# Altium PCB Booster_Common_Channel_RF.PcbDoc (part 3 of 3)
Units mm, origin at the board's own origin, x right, y up, seen from the top; angles counter-clockwise.
Board outline 159.2 x 28.7 mm, 2 copper layers (Top Layer, Bottom Layer), stack 1.071 mm thick; 192 components, 112 nets, 503 pads, 510 vias.
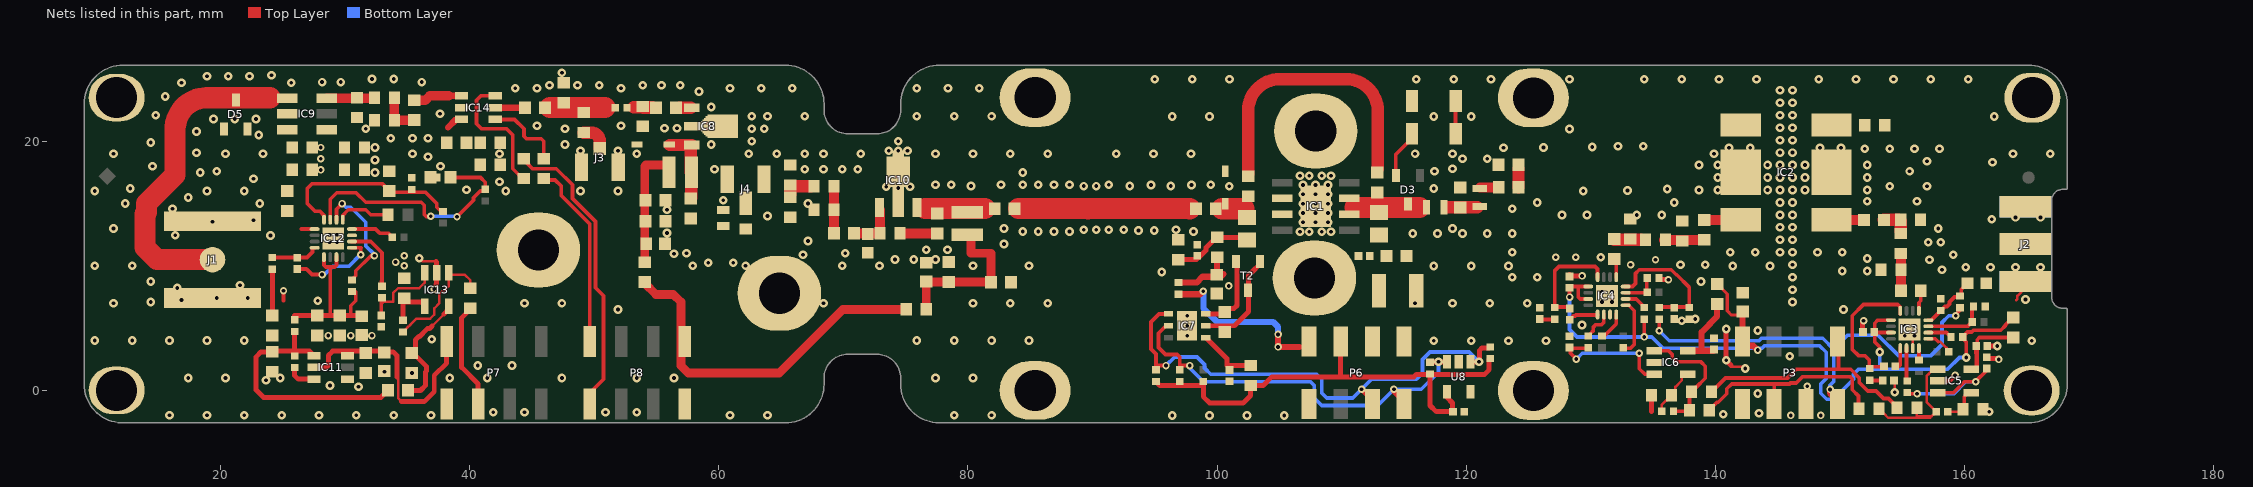
[diagram p2: the nets of this part, all layers, seen from the top]

## Via types
v1: diameter 0.7, hole 0.3, Top Layer to Bottom Layer, tented both sides, 450 vias
v2: diameter 0.6, hole 0.3, Top Layer to Bottom Layer, tented both sides, 60 vias

## Nets (pads, with @x,y where several pads share a name; then routed paths per layer and width w, separated by ;. In a path a pad name is that pad's centre, name@x,y a point inside that pad or via, vN(x,y) a via of type N, cw(c..) or ccw(c..) an arc to the next point about the centre after c; other vN are vias at no path point) (continued)
FWD_VREF: P3.1 R20.1 R24.1 | length 34
  Top Layer w0.3: v2(135.5,4.77) R24.1@135.5,5.67 ; v2(159.3,5.97) 159.3,6.07 R20.1@159.6,6.37
  Top Layer w0.5: v2(149.21,0.06) 149.21,-0.24 P3.1@149.8,-0.83
  Bottom Layer w0.3: v2(135.5,4.77) 136.3,3.97 143.5,3.97 143.7,4.17 148.624,4.17 149.5,3.294 ; v2(149.21,0.06) 149.21,0.39 149.5,0.68 149.5,3.294 ; v2(159.3,5.97) 158.747,5.97 158.2,5.423 158.2,3.658 157.312,2.77 154.7,2.77 153.058,4.412 150.617,4.412 149.5,3.294
FWD_VRMS: P3.5 R17.2 R42.1 | length 17.4
  Top Layer w0.3: R17.2@139.522,-1.632 139.597,-1.557 R17.2@139.572,-1.532 ; R17.2@139.522,-1.582 140.127,-0.977 140.24,-0.977 140.92,-0.298 140.92,0.105 141.315,0.5 144.638,0.5 ; P3.5@144.73,-1.15 144.73,0.408 144.638,0.5 ; R42.1@151.5,-1.53 151.5,-0.465 151,0.035 151,0.899 150.824,1.074 147.004,1.074 146.5,0.57 146.04,0.57 145.97,0.5 144.638,0.5
GND: C2.1 C3.1 C4.1 C5.1 C6.1 C7.1 C8.1 C13.1 C14.1 C17.1 C18.1 C20.2 C21.1 C23.2 C24.1 C25.1 C26.1 C27.1 C29.1 C30.1 C31.1 C32.1 C33.1 C35.1 C36.1 C37.1 C43.1 C45.1 C46.1 C47.1 C51.2 C52.1 C53.1 C54.1 C55.1 C56.2 C57.1 C58.1 C59.1 C60.2 D1.1 D4.2 D5.1 D5.2 D6.1 IC1.9 IC2.2 IC2.3 IC2.6 IC2.7 IC3.11 IC3.17 IC4.11 IC4.17 IC5.2 IC6.2 IC7.2 IC7.7 IC8.2 IC9.2 IC10.2 IC10.4 IC11.1 IC12.11 IC12.17 IC13.2 IC14.2 J1.2 J2.2 J3.2 J4.2 L10.1 P3.3 P3.7 P6.7 P7.7 P8.1 pad.0 pad.1 pad.2 pad.3 pad.4 pad.5 pad.6 pad.7 R9.1 R13.1 R14.1 R15.1 R16.1 R21.1 R28.2 R31.1 R32.1 R40.2 R45.1 R46.1 R48.2 R49.2 R52.1 R53.1 R54.1 R56.2 R58.1 R59.1 R60.2 R61.2 R65.1 R68.1 R73.2 T2.1 T2.3 U8.2 U8.5 | length 27.8
  Top Layer w0.203: 36.189,10.332 37.298,10.332 37.3,10.33 ; 141.258,1.994 141.357,1.896 142.244,1.896 v1(142.4,1.74) ; v1(154.4,-0.162) C20.2@154.4,0.77 ; IC3.11@155.85,3.42 IC3.17@155.85,4.62 ; 164.15,7.22 164.245,7.315 164.245,7.573 J2.2@164.9,8.227
  Top Layer w0.3: 25.05,7.18 v2(25.05,7.98)
  Top Layer w0.4: 37.298,8.48 37.35,8.532 37.35,10.28 37.3,10.33 ; IC7.2@99.1,5.17 101.4,5.17 102.529,6.299 102.529,9.199 102.8,9.47 102.8,9.487 103.433,10.12 T2.1@103.433,10.32 ; C17.1@128.3,9.27 128.4,9.17 v2(129.3,9.17) ; 134.88,-1.725 R32.1@134.88,-0.275 ; R9.1@135.431,9 135.561,8.87 v2(136.24,8.87) ; v1@140.9,4.94 v1(140.875,4.915) v1(140.875,2.402) 140.875,2.378 141.258,1.994 ; C14.1@151.8,4.67 151.8,5.47 v2(151.9,5.57) ; IC3.17@155.6,4.87 IC3.17@155.85,4.62 ; IC5.2@158,0.74 158.794,0.74 159.25,1.196 v2(159.247,1.196) ; C26.1@161.789,2.64 161.899,2.53 162.645,2.53 162.71,2.465 v2(162.76,2.465) ; C21.1@161.891,3.54 162.631,3.54 v1(162.641,3.55)
  other v1: 96.4,-2.03 99.4,-2.03 102.4,-2.03 105.4,-2.03 15.9,-2.02 18.9,-2.02 21.9,-2.02 24.9,-2.02 27.9,-2.02 30.9,-2.02 33.9,-2.02 36.9,-2.02 60.9,-2.02 63.9,-2.02 78.9,-2.02 81.9,-2.02 140.645,-1.932 143.508,-1.855 41.9,-1.77 44.4,-1.77 50.9,-1.77 53.4,-1.77 162,-1.73 143.399,-0.272 31.067,0.28 28.79,0.38 23.65,0.797 17.4,0.98 20.4,0.98 24.79,0.98 38.4,0.98 41.4,0.98 47.4,0.98 53.4,0.98 56.4,0.98 77.4,0.98 80.4,0.98 35.357,1.37 33.15,1.48 40.65,1.98 43.4,1.98 145.978,2.727 117.4,3.97 120.4,3.97 123.4,3.97 126.4,3.97 165.4,3.97 9.9,3.98 12.9,3.98 15.9,3.98 18.9,3.98 21.9,3.98 75.9,3.98 78.9,3.98 81.9,3.98 84.9,3.98 36.95,4.08 97.6,4.37 155.2,4.37 156,4.37 143.407,4.781 97.6,5.17 155.2,5.17 156,5.17 129.3,5.232 137.3,5.57 138.4,5.72 97.6,5.97 51.9,6.48 150.3,6.47 11.4,6.98 44.4,6.98 47.4,6.98 68.4,6.98 80.4,6.98 83.4,6.98 86.4,6.98 115.9,6.97 118.9,6.97 121.9,6.97 124.9,6.97 14.4,7.08 130.9,7.07 131.7,7.07 146.2,7.07 27.79,7.18 16.855,7.23 164.9,7.274 19.685,7.4 22.174,7.4 130.9,7.87 131.7,7.87 146.2,8.07 16.526,8.206 21.55,8.426 138.85,8.72 14.4,8.73 123.7,9.07 125.7,9.07 146.2,9.07 95.56,9.487 150.2,9.57 152.2,9.57 158.2,9.67 160.1,9.87 162.1,9.87 164.1,9.87 166.1,9.87 9.9,9.98 12.9,9.98 57.9,9.98 62.15,9.98 69.9,9.98 72.9,9.98 80.4,9.98 84.9,9.98 117.4,9.97 120.4,9.97 123.4,9.97 141.4,9.97 144.4,9.97 137.2,10.07 139.2,10.07 146.2,10.07 59.15,10.23 61.15,10.23 157.2,10.47 74.15,10.48 75.65,10.48 77.4,10.48 152.2,10.57 35.941,10.58 130.8,10.67 159.1,10.87 66.75,10.88 56.4,10.96 57.4,10.98 70.15,10.98 123.7,11.07 141.2,11.07 143.2,11.07 145.2,11.07 146.2,11.07 148.2,11.07 150.2,11.07 76.65,11.28 78.35,11.28 82.9,11.73 157.1,11.87 158.1,11.87 67.15,11.98 145.2,12.07 146.2,12.07 23.998,12.42 16.35,12.43 115.7,12.57 117.7,12.57 119.7,12.57 121.7,12.57 123.7,12.57 55.845,12.62 84.4,12.73 85.65,12.73 86.9,12.73 88.15,12.73 98.1,12.73 106.65,12.72 107.4,12.72 108.4,12.72 109.15,12.72 93.7,12.82 94.948,12.82 89.3,12.87 90.3,12.87 91.3,12.87 92.5,12.87 96.7,12.87 11.4,12.98 82.9,12.98 118.9,12.97 157.9,12.97 145.2,13.07 146.2,13.07 106.9,13.47 107.9,13.47 108.9,13.47 19.35,13.51 22.65,13.63 162.199,13.717 164.1,13.87 166.1,13.87 63.9,13.98 127.7,14.07 129.7,14.07 133.7,14.07 135.7,14.07 145.2,14.07 146.2,14.07 106.9,14.22 107.9,14.22 108.9,14.22 55.845,14.486 16.131,14.561 123.7,14.57 12.35,14.98 23.15,14.98 67.15,14.98 106.9,14.97 107.9,14.97 108.9,14.97 125.7,15.07 136.7,15.07 145.2,15.07 146.2,15.07 152.2,15.17 156.2,15.17 60.35,15.249 17.4,15.471 106.9,15.72 107.9,15.72 108.9,15.72 9.9,15.98 18.9,15.98 21.9,15.98 42.9,15.98 48.9,15.98 51.9,15.98 129.392,15.984 132.958,16.035 39.75,16.08 138.7,16.07 140.2,16.07 144.2,16.07 145.2,16.07 146.2,16.07 147.2,16.07 152.2,16.07 136.14,16.142 12.75,16.18 117.4,16.185 74.4,16.23 73.447,16.325 75.353,16.325 89.3,16.38 90.3,16.38 100.985,16.37 154,16.37 157,16.37 80.25,16.395 93,16.395 96.29,16.395 77.4,16.48 78.65,16.48 82.65,16.48 84.4,16.48 85.65,16.48 86.9,16.48 88.15,16.48 91.3,16.48 94.7,16.47 97.941,16.47 99.491,16.485 106.9,16.47 107.9,16.47 108.9,16.47 42.4,16.73 22.65,16.98 140.2,17.07 144.2,17.07 145.2,17.07 146.2,17.07 147.2,17.07 152.2,17.07 106.65,17.22 107.4,17.22 108.4,17.22 109.15,17.22 18.374,17.47 32.4,17.48 84.4,17.48 19.685,17.58 117.45,17.57 155.6,17.57 59.65,17.73 66.9,17.73 68.4,17.73 69.9,17.73 71.15,17.73 118.9,17.77 14.538,17.98 37.65,17.98 138.7,18.07 140.2,18.07 144.2,18.07 145.2,18.07 146.2,18.07 147.2,18.07 152.2,18.07 162.257,18.301 157,18.37 32.4,18.48 119.7,18.57 121.7,18.57 36.65,18.73 11.4,18.98 20.4,18.98 23.4,18.98 35.4,18.98 42.4,18.98 53.4,18.98 62.4,18.98 64.65,18.98 66.9,18.98 68.4,18.98 71.4,18.98 77.4,18.98 80.4,18.98 83.4,18.98 86.4,18.98 91.9,18.97 94.9,18.97 97.9,18.97 115.9,18.97 118.9,18.97 139.9,18.97 163.9,18.97 166.9,18.97 18.065,19.06 145.2,19.07 146.2,19.07 48.9,19.23 51.9,19.23 73.65,19.23 74.4,19.23 75.15,19.23 152,19.37 154,19.37 156,19.37 158,19.37 32.4,19.48 123,19.47 126.199,19.485 141.1,19.47 142.8,19.47 148.4,19.47 150.1,19.47 130.12,19.517 132.182,19.572 134.208,19.572 47.65,19.73 59.4,19.73 14.4,19.88 62.65,19.98 74.4,19.98 145.2,20.07 146.2,20.07 33.65,20.23 35.4,20.23 36.65,20.23 23.063,20.48 18.065,20.76 31.65,20.98 47.65,20.98 62.65,20.98 63.65,20.98 128.3,20.97 55.637,21.024 56.65,21.03 145.2,21.07 146.2,21.07 45.4,21.23 52.15,21.23 59.4,21.23 19.436,21.765 21.136,21.765 22.836,21.765 96.4,21.97 99.4,21.97 117.4,21.97 120.4,21.97 162.4,21.97 62.65,21.98 63.9,21.98 66.9,21.98 75.9,21.98 78.9,21.98 81.9,21.98 14.791,22.059 145.2,22.07 146.2,22.07 37.616,22.18 59.4,22.73 145.2,23.07 146.2,23.07 15.557,23.577 58.4,23.98 145.2,24.07 146.2,24.07 43.65,24.23 45.4,24.23 52.15,24.23 60.9,24.23 63.4,24.23 65.9,24.23 75.9,24.23 78.4,24.23 80.9,24.23 46.4,24.48 48.65,24.48 50.4,24.48 53.9,24.48 55.4,24.48 56.9,24.48 16.855,24.674 25.676,24.687 28.15,24.73 29.65,24.73 36.15,24.73 95,24.97 98,24.97 101,24.97 116,24.97 119,24.97 122,24.97 128.3,24.97 134.3,24.97 137.3,24.97 140.3,24.97 143.3,24.97 148.3,24.97 151.3,24.97 154.3,24.97 157.3,24.97 160.3,24.97 32.15,24.98 33.9,24.98 18.914,25.195 20.614,25.195 22.314,25.195 24.079,25.278 47.4,25.48
  other v2: 146.062,-2.03 148.46,-2.03 147.39,0.31 28.65,4.38 30.45,4.38 32.15,4.38 37.15,8.114 100.948,8.37 34.75,9.98 133.2,10.07 34.05,10.28 135.2,10.47 127.2,10.67 128.8,10.67 34.75,10.78 28.75,11.88 29.35,11.88 28.75,12.48 29.35,12.48 28.05,17.68 28.05,18.58 28.05,19.48
NetC1_1: C1.1 R5.2 | length 23
  Top Layer w1: R5.2@102.5,17.37 102.5,22.43 cw(c105.04,22.43) 105.04,24.97 110.36,24.97 cw(c110.36,22.43) 112.9,22.43 C1.1@112.9,17.77
NetC1_2: C1.2 D3.3 IC1.6 IC1.7 L3.1 L6.1 | length 5.2
  Top Layer w1.7: 111.1,14.674 113,14.674 115.33,14.674 116.264,14.674
NetC2_2: C2.2 R1.1 R4.1 | length 5.3
  Top Layer w0.5: R1.1@96.9,8.64 98.365,8.64 98.82,9.095 100.275,9.095 100.5,9.32 ; C2.2@99.969,9.27 99.984,9.286 99.984,10.654 R4.1@100,10.67
NetC3_2: C3.2 C4.2 L2.1 R4.2 | length 6.2
  Top Layer w0.4: C4.2@96.9,10.47 C3.2@98.357,10.47 ; C3.2@98.534,10.647 99.117,11.23 99.117,11.437 99.95,12.27 R4.2@100,12.27 102.2,12.27 L2.1@102.4,12.07
NetC9_1: C9.1 L7.2 | length 1.5
  Top Layer w0.8: L7.2@121.096,16.28 122.59,16.28 C9.1@122.6,16.27
NetC9_2: C9.2 C37.2 IC2.8 | length 1.5
  Top Layer w1: C9.2@124.2,16.27 C37.2@124.2,17.77
NetC10_1: C10.1 R10.2 R14.2 | length 2
  Top Layer w1: C10.1@153.533,13.67 R14.2@154.7,13.67 ; R10.2@154.9,12.77 R14.2@154.9,13.57
NetC10_2: C10.2 IC2.4 | length 2.3
  Top Layer w0.8: IC2.4@149.39,13.66 149.39,13.67 C10.2@151.681,13.67
NetC11_1: C11.1 R11.1 R15.2 | length 3.2
  Top Layer w0.8: R11.1@135.9,12.07 137.2,12.07 C11.1@139.1,12.07
NetC11_2: C11.2 IC2.5 | length 3
  Top Layer w0.8: C11.2@139.1,13.67 142.1,13.67 IC2.5@142.1,13.66
NetC12_1: C12.1 J2.1
NetC12_2: C12.2 IC2.1
NetC15_1: C15.1 IC3.1 | length 1.7
  Top Layer w0.3: IC3.1@156.35,6.32 156.35,7.02 156.5,7.17 C15.1@156.5,7.97
NetC15_2: C15.2 R10.1 R13.2 | length 3
  Top Layer w0.8: C15.2@154.9,7.97 R13.2@154.9,9.67 R10.1@154.9,10.97
NetC16_1: C16.1 IC4.1 | length 1.2
  Top Layer w0.3: C16.1@132,10.17 132.05,10.12 IC4.1@132.05,9.02
NetC16_2: C16.2 R11.2 R16.2 | length 2.1
  Top Layer w1: C16.2@131.882,12.076 133.162,12.076 R11.2@133.998,12.076
NetC19_1: C19.1 IC3.9 | length 1.6
  Top Layer w0.3: C19.1@154.7,1.87 154.85,2.02 IC3.9@154.85,3.42
NetC19_2: C19.2 IC3.4 R26.1 | length 10.9
  Top Layer w0.3: C19.2@153.5,1.87 152.368,1.87 152.368,2.402 152,2.77 151.5,2.77 151,3.27 151,5.97 151.9,6.87 154.65,6.87 154.85,6.67 154.85,6.32 IC3.4@154.85,6.12
NetC20_1: C20.1 R26.2 | length 0.8
  Top Layer w0.3: R26.2@152.6,0.77 C20.1@153.4,0.77
NetC21_2: C21.2 IC5.5 L1.1 | length 7.7
  Top Layer w0.3: IC5.5@160.55,1.69 IC5.5@160.87,1.69 ; IC5.5@160.8,1.62 IC5.5@160.87,1.69 ; C21.2@160.9,3.47 160.9,3.001 160.95,2.951 160.95,2.707 ; L1.1@163.904,4.23 163.894,4.22 161.201,4.22 161.025,4.044 161.025,3.47 161.025,3.001 161.025,2.707 ; IC5.5@160.87,1.69 160.875,1.69 161.025,1.84 161.025,2.707 ; IC5.5@160.87,1.69 160.95,1.77 160.95,2.707 ; 160.95,2.707 161.025,2.707
NetC22_1: C22.1 IC4.9 | length 2.4
  Top Layer w0.3: C22.1@128.306,5.66 128.593,5.948 128.741,5.948 128.822,6.029 IC4.9@130.55,6.029
NetC22_2: C22.2 IC4.4 R27.1 | length 8.5
  Top Layer w0.3: C22.2@128.3,6.67 127.1,6.67 127.1,9.57 127.45,9.92 130.35,9.92 130.55,9.72 IC4.4@130.55,9.02
NetC23_1: C23.1 R27.2 | length 1.2
  Top Layer w0.3: C23.1@125.9,5.67 R27.2@127.1,5.67
NetC24_2: C24.2 IC6.5 L4.1 | length 6.5
  Top Layer w0.5: IC6.5@137.65,3.17 138.9,3.17 ; C24.2@139.9,3.22 139.85,3.17 138.9,3.17 ; L4.1@140.146,6.91 140.146,5.926 139.55,5.33 139.55,5.298 138.9,4.648 138.9,3.17
NetC25_2: C25.2 IC4.16 R24.2 R28.1 | length 10.8
  Top Layer w0.3: IC4.16@132.75,8.32 133.35,8.32 133.6,8.57 133.6,9.37 133.9,9.67 136.469,9.67 136.869,9.27 136.9,9.27 137.9,8.27 137.9,6.67 136.7,6.67 R24.2@135.5,6.67
NetC26_2: C26.2 IC5.3 R29.1 | length 10.8
  Top Layer w0.3: R29.1@155.4,-0.23 155.45,-0.28 v2(156.2,-0.28) ; IC5.3@157.85,-0.21 159.132,-0.21 160.012,0.67 v2(160.9,0.67) 160.9,0.687 161.789,1.577 C26.2@161.789,1.74
  Bottom Layer w0.3: v2(156.2,-0.28) 159.165,-0.28 160.115,0.67 v2(160.9,0.67)
NetC27_2: C27.2 IC6.3 R30.1 | length 10.7
  Top Layer w0.3: C27.2@128.3,3.37 R30.1@129.8,3.37 ; C27.2@128.3,3.42 128.382,3.338 128.382,2.96 v2(128.846,2.496) ; v2(133.9,2.97) 133.9,1.72 134.35,1.27 IC6.3@135.25,1.27
  Bottom Layer w0.3: v2(128.846,2.496) 129.32,2.97 v2(133.9,2.97)
NetC28_1: C28.1 R8.2 R46.2 | length 3.9
  Top Layer w1: 53.156,22.73 C28.1@54.656,22.73 ; R46.2@53.95,22.68 C28.1@54.75,22.68 ; R46.2@53.95,22.68 C28.1@54.75,22.68 ; R46.2@53.95,22.68 C28.1@54.75,22.68
NetC28_2: C28.2 IC8.1 | length 0.9
  Top Layer w1: C28.2@56.85,22.68 IC8.1@57.75,22.68
NetC29_2: C29.2 IC7.1 R33.1 | length 4.9
  Top Layer w0.4: IC7.1@99.1,4.23 100.8,2.53 100.8,1.97 R33.1@102.7,1.97
NetC30_2: C30.2 IC3.16 R20.2 R40.1 | length 4.9
  Top Layer w0.3: IC3.16@157.05,5.62 IC3.16@157.1,5.62 157.35,5.62 R40.1@158.2,6.47 ; R40.1@158.1,6.47 R40.1@158.2,6.47 ; R20.2@159.6,7.559 159.6,7.47 159.2,7.47 158.803,7.073 158.803,6.924 158.596,6.717 158.447,6.717 R40.1@158.2,6.47 ; R20.2@159.65,7.559 159.748,7.657 159.748,8.077 C30.2@160.25,8.58
NetC31_2: C31.2 C32.2 C33.2 L8.2 L9.1 | length 9.2
  Top Layer w0.7: L8.2@54.046,10.27 54.046,12.48 54.046,14.28 54.046,15.745 54.046,16.976 54.05,16.98 54.05,17.98 54.15,18.08 55.45,18.08
NetC34_1: C34.1 R47.2 R49.1 | length 3.4
  Top Layer w0.76: R47.2@33.95,23.48 R49.1@33.95,21.68 C34.1@35.55,21.68
NetC34_2: C34.2 IC14.1 | length 3.5
  Top Layer w0.5: 38.3,23.63 IC14.1@39.35,23.63
  Top Layer w0.76: C34.2@35.95,23.28 36.439,23.28 36.789,23.63 38.3,23.63
NetC35_2: C35.2 IC7.3 T2.2 | length 6.3
  Top Layer w0.4: IC7.3@99.1,6.11 C35.2@100.6,6.11 ; C35.2@100.6,6.27 100.875,6.545 101.351,6.545 101.6,6.794 101.6,10.253 T2.2@101.533,10.32
NetC36_2: C36.2 L6.2 L7.1 | length 2.4
  Top Layer w1: L6.2@118.49,14.674 119.296,14.674 119.3,14.67 119.304,14.674 L7.1@120.9,14.674
NetC38_1: C38.1 D1.2 IC1.2 IC1.3 L2.2 R5.1 | length 1.8
  Top Layer w1.7: 100.4,14.57 102.15,14.57
NetC38_2: C38.2 C50.2 | length 19.4
  Top Layer w1.7: C50.2@84.05,14.58 86.85,14.58 ; 89.65,14.57 85.45,14.58 97.8,14.57
NetC39_1: C39.1 IC14.5 | length 2.5
  Top Layer w0.3: C39.1@44.4,22.63 C39.1@44.45,22.68
  Top Layer w0.5: IC14.5@42.05,22.68 C39.1@44.45,22.68
NetC39_2: C39.2 R8.1 R45.2 R50.2 | length 4.4
  Top Layer w1.7: C39.2@46.45,22.68 50.85,22.68
NetC40_1: C40.1 D6.2 IC8.3 L9.2 | length 6.2
  Top Layer w1: D6.2@56.071,19.68 IC8.3@57.825,19.68 ; L9.2@57.75,17.48 IC8.3@57.75,19.48 ; C40.1@57.8,15.43 L9.2@57.8,17.88
NetC40_2: C40.2 C41.1 L10.2 R51.2
NetC41_2: C41.2 R57.1 R60.1 | length 2.3
  Top Layer w1: C41.2@65.75,15.73 65.75,16.38 R57.1@67.4,16.38
NetC42_1: C42.1 R52.2 R56.1
NetC42_2: C42.2 IC14.3 | length 1.4
  Top Layer w0.5: 38.25,21.08 38.9,21.73 IC14.3@39.35,21.73
NetC43_2: C43.2 C49.2 IC10.1 R55.1 | length 4
  Top Layer w0.8: C49.2@70.85,12.58 71.95,12.58 R55.1@72.95,12.58 IC10.1@72.95,14.48
NetC44_1: C44.1 R55.2 | length 3
  Top Layer w0.8: R55.2@74.55,12.58 C44.1@77.55,12.58
NetC44_2: C44.2 C50.1 IC10.3 L5.2 | length 4.8
  Top Layer w1.7: 76.55,14.58 77.55,14.58 80.35,14.58 81.35,14.58
NetC45_2: C45.2 C46.2 C47.2 L5.1 L11.1 | length 12.6
  Top Layer w0.7: L11.1@76.66,6.476 76.65,6.486 76.65,8.68 C46.2@78.45,8.68 C45.2@81.85,8.68 81.85,10.98 80.25,10.98 L5.1@80.25,12.23
NetC48_1: C48.1 IC12.1 | length 1.1
  Top Layer w0.3: 26.5,12.93 IC12.1@27.6,12.93
NetC48_2: C48.2 IC9.1 R58.2 R59.2
NetC49_1: C49.1 R57.2 R61.1 | length 3.8
  Top Layer w0.8: C49.1@69.25,12.58 R57.2@69.25,16.38
NetC56_1: C56.1 IC12.15 R65.2 R66.2 | length 20.2
  Top Layer w0.3: IC12.15@28.8,13.63 IC12.15@28.8,13.68 28.8,15.33 29.325,15.855 30.875,15.855 31.65,15.08 36.104,15.08 36.346,14.838 36.346,14.11 36.528,13.928 36.842,13.928 v2(36.868,13.954) v2@36.894,13.98 ; C56.1@38.45,17.08 40.867,17.08 41.25,16.697 R66.2@41.25,16.13 41.11,15.99 40.844,15.99 40.3,15.447 40.3,15.249 v2(38.979,13.928)
  Bottom Layer w0.3: v2(36.868,13.954) 38.953,13.954 v2(38.979,13.928)
NetC57_2: C57.2 IC13.5 L12.1 | length 9.5
  Top Layer w0.2: C57.2@35.357,2.97 C57.2@35.364,2.97 ; 36.991,5.146 37.974,6.13 37.95,6.13
  Top Layer w0.4: L12.1@35.06,-0.024 36.045,-0.024 36.459,0.39 36.459,1.466 36.549,1.555 36.549,1.888 C57.2@35.357,3.08 ; 35.65,3.48 35.65,4.041 35.92,4.31 35.978,4.31 36.598,4.93 36.774,4.93 36.991,5.146 ; 37.95,6.13 38.3,6.48 IC13.5@38.3,6.88
NetC58_2: C58.2 IC12.16 R69.2 R73.1 | length 15.2
  Top Layer w0.3: IC12.16@28.3,13.63 IC12.16@28.3,13.68 28.3,14.03 27.975,14.355 27.575,14.355 26.95,14.98 26.95,16.18 27.35,16.58 32.95,16.58 C58.2@33.55,15.98 ; C58.2@33.55,15.88 36.459,15.88 37.359,14.98 37.359,14.682 R69.2@37.605,14.435
NetC59_2: C59.2 IC13.3 R74.1 | length 6.3
  Top Layer w0.2: 32.95,7.08 33.85,7.08 33.85,7.787 34.243,8.18 35.937,8.18 36.4,8.643 IC13.3@36.4,9.28
  Top Layer w0.3: C59.2@32.9,5.98 C59.2@32.9,5.99 32.9,7.03 32.95,7.08
  Top Layer w0.4: 32.943,7.08 32.95,7.08
NetC60_1: C60.1 R75.1 | length 3.4
  Top Layer w0.4: C60.1@24.15,5.98 24.15,9.38
NetC61_1: C61.1 IC12.9 | length 7.3
  Top Layer w0.3: C61.1@26.15,9.73 26.885,9.73 27.335,9.28 v2(28.15,9.28) ; IC12.9@30.5,11.43 31.3,11.43 31.25,11.38 v2(31.25,10.88)
  Bottom Layer w0.3: v2(28.15,9.28) 28.35,9.28 29.019,9.949 30.3,9.949 31.231,10.88 v2(31.25,10.88)
NetC61_2: C61.2 IC12.4 R75.2 | length 4
  Top Layer w0.3: R75.2@24.15,10.65 26.938,10.65 27.385,11.097 27.385,11.43 IC12.4@27.55,11.43 IC12.4@27.6,11.43
NetD2_1: D2.1 D3.2 | length 3.8
  Top Layer w0.3: D3.2@114.352,17.359 114.352,18.912 114.871,19.431 115.65,20.21 D2.1@115.65,20.585
NetD2_2: D2.2 D4.1 | length 2.6
  Top Layer w0.3: D2.2@119.15,20.585 D4.1@119.15,23.22
NetD5_3: D5.3 IC9.3 J1.1 | length 25.4
  Top Layer w1.7: J1.1@19.35,10.48 14.891,10.48 13.928,11.443 13.928,14.154 14.05,14.276 14.05,14.98 16.35,17.28 16.35,20.94 cw(c18.89,20.94) 18.89,23.48 21.224,23.48 23.967,23.48
NetIC3_10: IC3.10 R29.2 | length 2.7
  Top Layer w0.3: R29.2@155.35,0.77 IC3.10@155.35,3.42 ; R29.2@155.4,0.77 R29.2@155.45,0.82
NetIC3_12: IC3.12 R25.2 | length 1
  Top Layer w0.3: IC3.12@156.35,3.42 156.35,2.62 R25.2@156.5,2.47
NetIC3_13: IC3.13 R38.2 | length 2.2
  Top Layer w0.203: 157.891,3.879 158.073,3.879 158.561,3.391 158.561,3.268 R38.2@158.749,3.08
  Top Layer w0.3: IC3.13@157.05,4.12 157.65,4.12 157.891,3.879
NetIC3_14: IC3.14 R18.2 | length 1.7
  Top Layer w0.3: IC3.14@157.05,4.62 158.55,4.62 R18.2@158.7,4.47
NetIC3_15: IC3.15 R7.1 R21.2 | length 4.8
  Top Layer w0.3: IC3.15@157.05,5.12 160.25,5.12 160.6,5.47 160.6,6.53 R21.2@160.64,6.57
NetIC4_10: IC4.10 R30.2 | length 2.6
  Top Layer w0.3: R30.2@129.8,4.37 129.85,4.37 129.96,4.48 129.96,4.53 130.21,4.78 130.21,5.069 130.386,5.245 130.874,5.245 131.05,5.421 IC4.10@131.05,6.12
NetIC4_12: IC4.12 R37.2 | length 2.2
  Top Layer w0.3: R37.2@131,4.37 131.1,4.37 132.05,5.32 IC4.12@132.05,6.12
NetIC4_13: IC4.13 R39.2 | length 4.7
  Top Layer w0.3: R39.2@132.6,3.37 133.2,3.37 133.5,3.67 133.5,6.37 133.05,6.82 IC4.13@132.75,6.82
NetIC4_14: IC4.14 R19.1 | length 1.8
  Top Layer w0.3: IC4.14@132.75,7.32 133.65,7.32 R19.1@134.3,6.67
NetIC4_15: IC4.15 R2.1 R9.2 | length 2.8
  Top Layer w0.3: IC4.15@132.75,7.82 134.45,7.82 134.5,7.87 134.5,8.83 R9.2@134.54,8.87
NetIC5_1: IC5.1 R22.1 R41.2 R42.2 | length 12.5
  Top Layer w0.203: R42.2@153.135,-1.478 153.135,-1.528 153.483,-1.876 153.533,-1.876 153.887,-2.23 157.23,-2.23 157.372,-2.088 ; R41.2@156.183,-1.402 156.183,-2.088 157.372,-2.088 ; IC5.1@158,1.69 IC5.1@157.85,1.69 157.525,1.69 IC5.1@157.327,1.492 ; IC5.1@158.25,1.62 157.78,1.62 157.652,1.492 IC5.1@157.327,1.492 ; IC5.1@157.327,1.492 157.129,1.294 157.12,1.294 156.971,1.145 156.971,-0.951 157.73,-1.71 R22.1@157.73,-1.73 157.73,-1.75 157.542,-1.938 157.522,-1.938 157.372,-2.088
NetIC5_4: IC5.4 R22.2 R31.2 | length 3.3
  Top Layer w0.203: R22.2@158.67,-1.73 159.69,-1.73 R31.2@159.891,-1.529
  Top Layer w0.3: R31.2@159.979,-1.529 159.979,-0.536 160.075,-0.44 160.075,-0.36 160.155,-0.28 IC5.4@160.8,-0.28
NetIC6_1: IC6.1 R12.1 R17.1 R23.1 | length 10.5
  Top Layer w0.3: IC6.1@135.25,3.17 136.25,3.17 136.55,2.87 136.55,2.634 136.914,2.27 138.85,2.27 139.2,1.92 139.2,0.96 138.45,0.21 138.4,0.21 138.1,-0.09 R12.1@138.1,-0.14 137.922,-0.318 R17.1@137.922,-1.386 ; R23.1@136.636,-1.698 137.856,-1.698 R17.1@137.922,-1.632 R17.1@137.922,-1.386 ; R17.1@137.678,-1.629 R17.1@137.922,-1.386 ; R17.1@137.978,-1.279 137.978,-1.329 R17.1@137.922,-1.386
NetIC6_4: IC6.4 R23.2 R32.2 | length 4.1
  Top Layer w0.203: R23.2@135.696,-1.698 135.696,-1.176 136.082,-0.79 136.132,-0.79 136.48,-0.442 R32.2@136.48,-0.392 136.797,-0.076 136.797,0.267 137.325,0.795 137.325,1.072 137.524,1.27 IC6.4@137.8,1.27
  Top Layer w0.3: R32.2@136.18,-0.392 R32.2@136.23,-0.342
NetIC9_4: IC9.4 R47.1 R48.1 | length 3.8
  Top Layer w0.76: IC9.4@28.54,23.45 32.32,23.45 R47.1@32.35,23.48
NetIC9_6: IC9.6 R53.2 R54.2
NetIC11_6: IC11.6 R62.1 | length 2.4
  Top Layer w0.4: R62.1@25.95,1.81 25.95,1.161 26.233,0.878 IC11.6@27.5,0.878 IC11.6@27.55,0.878
NetIC12_10: IC12.10 R74.2 | length 5.2
  Top Layer w0.3: IC12.10@30.5,11.93 32.052,11.93 32.952,11.03 32.952,8.682 32.95,8.68 32.9,8.73
NetIC12_12: IC12.12 R71.2 | length 3.5
  Top Layer w0.3: IC12.12@30.5,12.93 IC12.12@30.55,12.93 32.444,12.93 32.768,12.606 33.455,12.606 R71.2@33.75,12.311
NetIC12_13: IC12.13 R72.1 | length 4.4
  Top Layer w0.3: IC12.13@29.8,13.63 29.8,14.03 30.25,14.48 31.65,14.48 32.05,14.08 R72.1@33.45,14.08
NetIC12_14: IC12.14 R64.2 | length 9.8
  Top Layer w0.3: IC12.14@29.3,13.63 29.3,14.53 v2(29.75,14.98) ; R64.2@30.55,8.88 30.85,9.18 30.85,9.58 32.05,10.78 v2(32.35,10.78)
  Bottom Layer w0.3: v2(29.75,14.98) 30.05,14.68 30.45,14.68 31.65,13.48 31.65,11.58 v2@32.35,10.88
NetIC13_1: IC13.1 R67.1 R70.1 | length 9.4
  Top Layer w0.2: R67.1@34.65,4.68 35.044,5.074 35.065,5.074 35.212,5.222 35.212,5.242 35.716,5.746 36.832,5.746 37.15,6.064 37.15,6.57 37.55,6.97 37.55,7.696 37.784,7.93 37.891,7.93 38.3,8.338 38.3,9.28 39.595,9.28 40.05,8.825 R70.1@40.05,8.18
NetIC13_4: IC13.4 R67.2 R68.2 | length 3
  Top Layer w0.4: 34.65,5.98 34.65,6.98 34.75,7.08 36.1,7.08 IC13.4@36.45,6.73
NetIC14_4: IC14.4 R44.1 | length 6
  Top Layer w0.3: IC14.4@42.05,21.73 43.6,21.73 44.35,20.98 44.35,20.38 44.55,20.18 45.75,20.18 45.95,19.98 R44.1@45.95,18.98
NetIC14_6: IC14.6 R43.1 | length 10.4
  Top Layer w0.3: IC14.6@41.65,23.63 40.9,23.63 40.55,23.28 40.55,21.38 40.95,20.98 42.95,20.98 43.45,20.48 43.45,17.78 R43.1@44.35,16.88
NetJ3_1: J3.1 R50.1 | length 2.1
  Top Layer w1: R50.1@49.15,20.68 49.75,20.68 cw(c49.75,19.98) 50.45,19.98 ; J3.1@50.45,19.405 J3.1@50.45,19.78
NetJ4_1: J4.1 R51.1
NetP7_5: P7.5 R70.2 | length 8.4
  Top Layer w0.4: R70.2@40.05,6.58 40.05,6.5 39.35,5.8 39.35,1.828 40.68,0.498 P7.5@40.68,-1.02
OUT_BIAS: P6.8 R1.2 | length 14.4
  Top Layer w0.5: R1.2@96.9,7.7 98.635,7.7 98.873,7.938 v2(98.9,7.938) ; v2(104.9,4.47) v2(104.9,3.47) 106.59,3.47
  Bottom Layer w0.5: v2(98.9,7.938) 98.9,6.57 100,5.47 104.5,5.47 104.9,5.07 v2(104.9,4.47) v2(104.9,3.47)
P3V3: C13.2 P6.6 R3.1 R6.1 R33.2 R34.1 R35.1 R36.1 U8.4 | length 39.2
  Top Layer w0.4: R35.1@95.1,0.67 95.4,0.37 98.9,0.37 98.9,-0.53 99.4,-1.03 102.1,-1.03 102.7,-0.43 R33.2@102.7,0.37 103.7,0.37 104.4,1.07 109.9,1.07 ; P6.6@109.9,3.47 109.9,1.07 ; U8.4@118.45,-0.13 118.45,-0.58 118.9,-1.03 118.9,-1.73 117.6,-1.73 117.1,-1.23 R3.1@117.1,1.27 ; R6.1@121.925,2.53 121.849,2.455 121.849,1.64 121.479,1.27 R3.1@117.1,1.27 ; 109.9,1.07 115.8,1.07 116,1.27 R3.1@117.1,1.27
P3V3A: C51.1 IC11.4 L12.2 R62.2 R63.1 | length 20
  Top Layer w0.4: 25.95,3.08 26,3.13 27.148,3.13 IC11.4@27.5,2.778 ; 25.95,4.38 25.95,3.13 24.2,3.13 C51.1@24.15,3.08 23.25,3.08 22.85,2.68 22.85,0.012 23.443,-0.581 32.883,-0.581 L12.2@33.44,-0.024
P3V3A1: C8.2 C14.2 C17.2 IC3.5 IC3.7 IC4.5 IC4.7 L1.2 L4.2 P3.8 R18.1 R19.2 | length 67.5
  Top Layer w0.254: L4.2@140.146,8.53 140.954,7.722 140.954,6.366 141.285,6.035 142.19,6.035 C8.2@142.2,6.045
  Top Layer w0.3: v2(128.3,7.47) C17.2@128.3,8.22 128.3,8.27 128.35,8.32 129,8.32 ; IC4.7@129.85,7.32 IC4.7@129.8,7.32 129.15,7.32 129,7.47 129,8.32 ; IC4.5@129.85,8.32 IC4.5@129.8,8.32 129,8.32 ; v2(134.3,4.27) R19.2@134.3,5.67 ; v1(153.2,3.07) 153.2,3.47 152.8,3.87 C14.2@152.8,4.67 ; IC3.7@154.15,4.62 IC3.7@154.1,4.62 152.85,4.62 C14.2@152.8,4.67 ; IC3.5@154.15,5.62 IC3.5@154.1,5.62 153.05,5.62 152.8,5.37 C14.2@152.8,4.67 ; R18.1@159.87,4.27 159.87,4.29 160.248,4.668 160.578,4.668 160.727,4.817 162.877,4.817 162.921,4.817 163.303,5.199 163.303,5.243 L1.2@163.9,5.84 ; R18.1@160.01,4.28 160.01,4.012 160.15,3.872 v1(160.15,2.62)
  Top Layer w0.5: C8.2@142.19,6.035 142.19,3.57 143.05,3.57 v2(143.4,3.22)
  Bottom Layer w0.3: v2(128.3,7.47) 128.3,4.87 128.9,4.27 v2(134.3,4.27) 134.9,4.27 135.8,3.37 143.749,3.37 143.949,3.57 148.376,3.57 148.9,3.046 148.9,0.929 148.46,0.489 148.46,-0.251 148.939,-0.73 149.5,-0.73 151.1,0.87 151.1,1.27 151.5,1.67 153.2,1.67 ; v1(153.2,3.07) 153.2,1.67 ; v1(160.15,2.62) 159.6,2.62 158.65,1.67 153.2,1.67
P3V3ADL: C53.2 C54.2 C55.2 IC12.5 IC12.7 R63.2 R64.1 | length 13.9
  Top Layer w0.3: IC12.5@28.3,10.73 28.3,10.03 28.45,9.88 28.8,9.88 ; 28.85,5.98 28.8,6.03 28.8,9.88 ; IC12.7@29.3,10.73 29.3,10.03 29.15,9.88 28.8,9.88 ; 30.45,5.98 30.45,6.78 30.85,7.18 R64.1@30.85,7.88
  Top Layer w0.4: 25.95,5.98 C53.2@27.75,5.98 28.85,5.98 C54.2@29.55,5.98 30.45,5.98 C55.2@31.35,5.98
RET_VRMS: P3.2 R12.2 R41.1 | length 19.1
  Top Layer w0.3: R12.2@139.7,-0.14 139.7,-0.09 140,0.21 140.05,0.21 140.81,0.97 145.8,0.97 146.5,1.67 149.9,1.67 ; P3.2@149.81,3.57 149.9,3.48 149.9,1.67 ; R41.1@154.583,-1.402 154.583,-1.352 153.906,-0.675 153.51,-0.675 152.908,-0.073 152.246,-0.073 151.557,0.615 151.557,0.981 150.869,1.67 149.9,1.67
SCK: IC7.4 P6.3 R6.2 R35.2 U8.1 | length 40.1
  Top Layer w0.3: v2(95.9,1.97) 95.1,1.97 95.1,2.908 94.7,3.308 94.7,5.47 95.34,6.11 IC7.4@96.1,6.11
  Top Layer w0.4: v2@111.67,0 P6.3@112.6,-0.93 ; U8.1@120.35,2.27 v1(121.025,2.27) 121.082,2.327 121.082,3.201 121.262,3.38 121.835,3.38 R6.2@121.925,3.47
  Bottom Layer w0.3: v2(95.9,1.97) 96.6,2.67 98.4,2.67 99,2.07 99,1.77 99.5,1.27 108,1.27 108.4,0.87 108.4,-0.23 108.8,-0.63 110.9,-0.63 v2(111.6,0.07) 112.4,0.87 116,0.87 116.5,1.37 116.5,2.47 117.1,3.07 120.225,3.07 v1(121.025,2.27)
SDA: IC7.5 P6.1 R3.2 R34.2 U8.3 | length 32.6
  Top Layer w0.3: IC7.5@96.1,5.17 95.9,5.17 95.3,4.57 95.3,3.42 95.85,2.87 96.8,2.87 97,2.67 97,1.97 v2(97.8,1.97)
  Top Layer w0.4: v2(114.2,0.07) 114.21,0.06 114.21,-0.14 P6.1@115.2,-1.13 ; R3.2@117.1,2.27 v1(117.775,2.27) U8.3@118.45,2.27
  Bottom Layer w0.3: v2(97.8,1.97) 97.8,1.77 98.9,0.67 107.5,0.67 107.8,0.37 107.8,-0.63 108.4,-1.23 112.9,-1.23 v2(114.2,0.07) 116.4,0.07 117.775,1.445 v1(117.775,2.27)
SW_RF_A: P8.8 R44.2 | length 15
  Top Layer w0.3: R44.2@45.95,16.88 46.85,16.88 47.35,16.38 47.35,15.634 49.64,13.344 P8.8@49.64,3.98
SW_RF_B: P8.7 R43.2 | length 23.8
  Top Layer w0.3: R43.2@44.35,18.58 44.6,18.33 44.6,18.228 45.048,17.78 46.95,17.78 48.248,16.482 48.248,15.376 50.092,13.531 50.092,8.228 50.75,7.57 50.75,0.88 49.64,-0.23 P8.7@49.64,-1.02
VCC_PREAMP: L8.1 L11.2 P8.2 | length 29.1
  Top Layer w0.7: L8.1@54.046,8.584 54.95,7.68 56.35,7.68 56.96,7.07 56.96,3.98 56.96,1.97 57.55,1.38 64.85,1.38 69.946,6.476 L11.2@75.04,6.476
VCC_PREAMP_1: C18.2 C52.2 IC11.3 IC11.5 P7.8 | length 19.1
  Top Layer w0.203: 34.167,1.061 34.25,0.979 34.25,-0.644 34.526,-0.92
  Top Layer w0.381: 34.526,-0.92 36.35,-0.92 37.149,-0.121 37.149,1.179 38.14,2.17 P7.8@38.14,3.98
  Top Layer w0.4: IC11.5@27.55,1.828 28.497,1.828 28.65,1.981 28.65,2.78 29,3.13 33.1,3.13 33.15,3.08 33.85,3.08 34.167,2.763 34.167,1.061
VCC_PWRAMP: C5.2 C6.2 C7.2 L3.2 P6.2 P6.4
pads on no net: D3.1 FTG1.FTG2 FTG2.1 IC1.1 IC1.4 IC1.5 IC1.8 IC3.2 IC3.3 IC3.6 IC3.8 IC4.2 IC4.3 IC4.6 IC4.8 IC9.5 IC11.2 IC12.2 IC12.3 IC12.6 IC12.8 P7.2 P7.4 P8.3 P8.4 P8.5 P8.6

## Polygon pours and split planes (outlines as drawn)
GND on Top Layer "tg" (solid, remove dead copper, pour order 8): 88.3,-2.52 88.3,-2.62 164.182,-2.62 ccw(c165.15,0.22) 165.15,-2.78 ccw(c165.15,0.22) 168.15,0.22 168.15,6.47 167.9,6.47 cw(c167.9,7.47) 166.9,7.47 166.9,14.47 cw(c167.9,14.47) 167.9,15.47 168.15,15.47 168.15,23.22 ccw(c165.15,23.22) 165.15,26.22 88.3,26.22 77.67,26.23 ccw(c77.7,22.98) 74.45,22.98 74.45,22.48 cw(c72.7,22.48) 74.45,22.48 cw(c72.7,22.48) 72.7,20.73 cw(c72.7,22.48) 72.7,20.73 70.35,20.73 cw(c70.35,22.48) 68.6,22.48 68.6,22.98 ccw(c65.038,22.429) 65.781,25.956 10.966,26.007 ccw(c12.15,22.98) 8.9,22.98 8.9,0.48 ccw(c12.15,0.48) 12.012,-2.767 ccw(c12.05,-2.521) 12.05,-2.77 ccw(c12.05,-2.521) 12.299,-2.521 ccw(c12.05,-2.521) 12.299,-2.52 66.601,-2.52 ccw(c65.35,0.48) 68.6,0.48 68.6,0.98 cw(c70.35,0.979) 70.35,2.73 72.7,2.73 cw(c72.7,0.98) 74.45,0.98 74.45,0.48 ccw(c77.7,0.48) 76.449,-2.52
GND on Bottom Layer "Bottom Layer-GND" (solid, remove dead copper, pour order 9): 88.65,-2.78 165.15,-2.78 ccw(c165.15,0.22) 168.15,0.22 168.15,6.47 167.9,6.47 cw(c167.9,7.47) 166.9,7.47 166.9,14.47 cw(c167.9,14.47) 167.9,15.47 168.15,15.47 168.15,23.22 ccw(c165.15,23.22) 165.15,26.22 88.65,26.22 ccw(c88.64,26.22) 88.64,26.23 ccw(c88.64,26.22) 88.64,26.23 77.7,26.23 ccw(c77.7,22.98) 74.45,22.98 74.45,22.48 cw(c72.7,22.48) 72.7,20.73 70.35,20.73 cw(c70.35,22.48) 68.6,22.48 68.6,22.98 ccw(c65.35,22.98) 65.35,26.23 12.15,26.23 ccw(c12.15,22.98) 8.9,22.98 8.9,0.48 ccw(c12.15,0.48) 12.012,-2.767 ccw(c12.05,-2.52) 12.05,-2.77 ccw(c12.05,-2.52) 12.05,-2.77 65.35,-2.77 ccw(c65.35,0.48) 68.6,0.48 68.6,0.98 cw(c70.351,0.979) 70.35,2.73 72.7,2.73 cw(c72.7,0.98) 74.45,0.98 74.45,0.48 ccw(c77.7,0.48) 77.7,-2.77 88.65,-2.77

## Other copper
Top Layer:
  rectangle net GND: 20.758,11.92 23.23,14.86
  rectangle net GND: 15.758,11.983 17.638,14.762
  rectangle net GND: 21.118,5.28 23.35,9.04
  rectangle net GND: 14.891,5.99 17.582,9.118
  rectangle net GND: 73.4,15.915 75.65,19.48
  rectangle net NetC40_2: 64.85,12.98 66.6,14.28
  rectangle net NetC42_1: 39.55,17.58 41.25,20.38
  rectangle net NetC42_2: 37.75,19.38 38.55,21.33
  rectangle net NetC48_1: 24.55,13.98 26.15,14.78
  rectangle net NetC48_2: 24.55,15.58 26.25,21.28
  rectangle net VCC_PWRAMP: 112,2.27 114,12.27
  region net NetC1_2: 113.7,15.47 110.15,15.47 110.15,13.97 113.7,13.97
  rectangle net NetC38_1: 101.2,13.97 105.65,15.47
  rectangle net NetC12_2: 150.5,20.37 152.4,22.17
  rectangle net OUT_BIAS: 104.4,2.37 107.7,4.77
  rectangle net VCC_PWRAMP: 112,2.27 115.6,4.67
  rectangle net NetC12_1: 153.2,20.42 153.6,22.12
  rectangle net GND: 59.075,20.23 64.401,22.13
  pour cut-out: 166.9,13.97 166.9,15.22 cw(c167.9,15.22) 167.9,16.22 168.15,16.22 168.15,13.97
  pour cut-out: 114.4,13.12 114.4,13.27 ccw(c113.7,13.27) 113.7,13.97 112.4,13.97 ccw(c112.4,12.97) 111.4,12.97
  pour cut-out: 32.85,8.18 35.55,8.18 36.5,7.23 34.65,5.38 32.419,5.38
  pour cut-out: 32.85,11.28 35.4,11.28 35.675,11.555 35.15,12.08 33.75,12.08
  region net P3V3ADL: 28.8,8.88 29.6,8.08 31.15,8.08 31.75,7.48 31.75,5.88 27.85,5.88 27.75,5.98 28.8,7.03
  pour cut-out: 42.42,2.43 41.45,2.43 40.65,3.23 42.15,4.73 42.9,4.73
  pour cut-out: 25.15,0.78 25.15,3.78 25.2,3.73 26.8,3.73 26.8,0.72
  pour cut-out: 33.85,3.68 33.85,5.88 34.65,6.68 35.45,5.88 35.45,3.68
  pour cut-out: 23.35,6.68 27.744,6.68 26.75,5.686 26.75,3.68 25.15,3.68 25.15,5.28 23.35,5.28
  pour cut-out: 23.35,11.68 23.35,8.68 25.35,8.68 26.75,10.08 26.75,10.931 26.001,11.68
  pour cut-out: 37.44,2.53 41.35,2.53 39.15,4.73
  pour cut-out: 27.215,20.03 27.215,24.33 29.9,24.33 29.95,24.38 29.95,20.03
  region net NetC40_2: 58.6,12.98 64.85,12.98 64.85,14.28 66.6,14.28 66.6,12.81 65.07,11.28 58.6,11.28 58.43,11.28 56.9,12.81 56.9,12.98 56.9,14.18 58.6,14.18
  region net VCC_PREAMP: 52.15,9.48 56.05,9.48 61.55,3.98 66.65,3.98 70.15,7.48 74.85,7.48 75.45,6.88 75.45,4.48 74.45,3.48 69.15,3.48 67.65,1.98 67.65,0.48 66.15,-1.02 59.45,-1.02 56.15,2.28 56.15,5.73 55.4,6.48 53.65,6.48 52.15,7.98
  region net NetIC9_6: 27.75,20.68 28.45,20.68 28.85,20.28 28.85,17.18 30.55,17.18 30.55,20.48 29.75,21.28 28.95,21.28
  region net NetC48_1: 27.05,13.08 26.15,13.98 26.15,14.78 24.65,14.765 24.55,13.38 25.15,12.78 26.95,12.78
  pour cut-out: 72.4,13.48 72.9,12.98 76.65,12.98 76.65,13.23 76.4,13.48
  pour cut-out: 39.75,23.88 39.75,21.88 39.85,21.78 40.25,22.18 40.25,23.78 39.95,24.08
  pour cut-out: 43.65,16.08 46.65,16.08 46.65,19.78 43.65,19.78
  pour cut-out: 97.8,15.932 100.6,15.932 100.6,13.208 97.8,13.208
  region net NetC9_2: 142.1,20.43 136.85,20.43 136.85,18.45 135.32,16.92 124.5,16.92 124.5,18.62 135.15,18.62 135.15,20.43 135.15,20.6 136.68,22.13 142.1,22.13
  pour cut-out: 98.9,3.887 104.233,3.887 104.233,11.27 102.1,11.27 102.1,9.17 101.871,9.17 101.871,6.57 98.9,6.57
  region net NetC12_1: 161.279,20.59 161.279,20.42 161.279,12.57 164.9,12.57 164.9,10.87 161.279,10.87 161.109,10.87 159.579,12.4 159.579,12.57 159.579,20.42 153.6,20.42 153.6,22.12 159.749,22.12
  text "ALIGN CONENCTORS" at 93,32.9 h2
  text "ALIGN CONENCTORS" at 35.55,32.3 h2
Bottom Layer:
  pour cut-out: 166.9,13.97 166.9,15.22 cw(c167.9,15.22) 167.9,16.22 168.15,16.22 168.15,13.97

## Silkscreen, mask and mechanical layers (free items; w line width, h text height)
Top Overlay:
  text "Booster  / Power  / Stage v1.5" at 89.3,19.211 h1.27
  text "WUT 2019" at 89.647,17.58 h1
Bottom Overlay:
  rectangle: 127.2,1.464 129.3,4.964
  region: 135.99,2.47 135.99,8.07 127.538,8.07 127.538,2.47
  rectangle: 159.261,4.226 163.861,7.726
  rectangle: 134.909,-2.78 162.284,8.07
  rectangle: 94.6,-1.915 121.975,6.185
  rectangle: 96.6,5.67 101.2,9.17
  rectangle: 36.2,12.78 40.8,16.28
  rectangle: 22.6,8.58 34.3,16.68
Top Solder:
  lines w1.8: 13.85,11.38 13.85,14.78 16.35,17.28 16.35,20.48 ; 22.724,23.48 23.45,23.48
Bottom Solder:
  rectangle: 87.65,-2.9 93.9,26.98
  rectangle: 154.9,7.47 168.9,27.72
  rectangle: 92.9,11.47 168.9,27
  rectangle: 122.4,-3.03 126.4,11.97
  rectangle: 163.429,-3.03 168.9,7.97
  rectangle: 125.7,-3.03 131.7,1.27
  rectangle: 32.493,12.419 35.684,16.18
  rectangle: 33.393,8.426 40.393,12.78
  rectangle: 8.393,-2.02 22.393,26.98
  rectangle: 8.393,15.88 41.393,26.98
  rectangle: 39.893,-3.02 88.393,26.98
  rectangle: 8.393,-3.02 88.393,8.58
  region: 104.15,11.97 104.15,7.97 108.15,3.97 123.3,3.97 123.3,12.67 122.412,13.558
Mechanical 1:
  drawing of 221 lines, arcs and shapes, not listed
  text "Layer" at 25.608,55.954 h1.52
  text "Name" at 36.02,55.954 h1.52
  text "Material" at 59.636,55.954 h1.52
  text "Thickness" at 81.474,55.954 h1.52
  text "Constant" at 97.98,55.954 h1.52
  text "Board Layer Stack" at 112.454,55.954 h1.52
  text "Top Overlay" at 36.02,52.906 h1.52
  text "Top Solder" at 36.02,49.858 h1.52
  text "Solder Resist" at 59.636,49.858 h1.52
  text "3.5" at 97.98,49.858 h1.52
  text "1" at 25.608,46.81 h1.52
  text "Top Layer" at 36.02,46.81 h1.52
  text "0,036mm" at 81.474,46.81 h1.52
  text "Dielectric 1" at 36.02,43.762 h1.52
  text "FR408" at 59.636,43.762 h1.52
  text "1,000mm" at 81.474,43.762 h1.52
  text "3.67" at 97.98,43.762 h1.52
  text "2" at 25.608,40.714 h1.52
  text "Bottom Layer" at 36.02,40.714 h1.52
  text "0,036mm" at 81.474,40.714 h1.52
  text "Bottom Solder" at 36.02,37.666 h1.52
  text "Solder Resist" at 59.636,37.666 h1.52
  text "3.5" at 97.98,37.666 h1.52
  text "Bottom Overlay" at 36.02,34.618 h1.52